# Altium PCB Logger_L072CB_LiPo_Flash_EEprom.PcbDoc
Units mil, origin at the board's own origin, x right, y up, seen from the top; angles counter-clockwise.
Board outline 2165.35 x 1181.1 mil, 2 copper layers (Top Layer, Bottom Layer); 53 components, 36 nets, 195 pads, 52 vias.
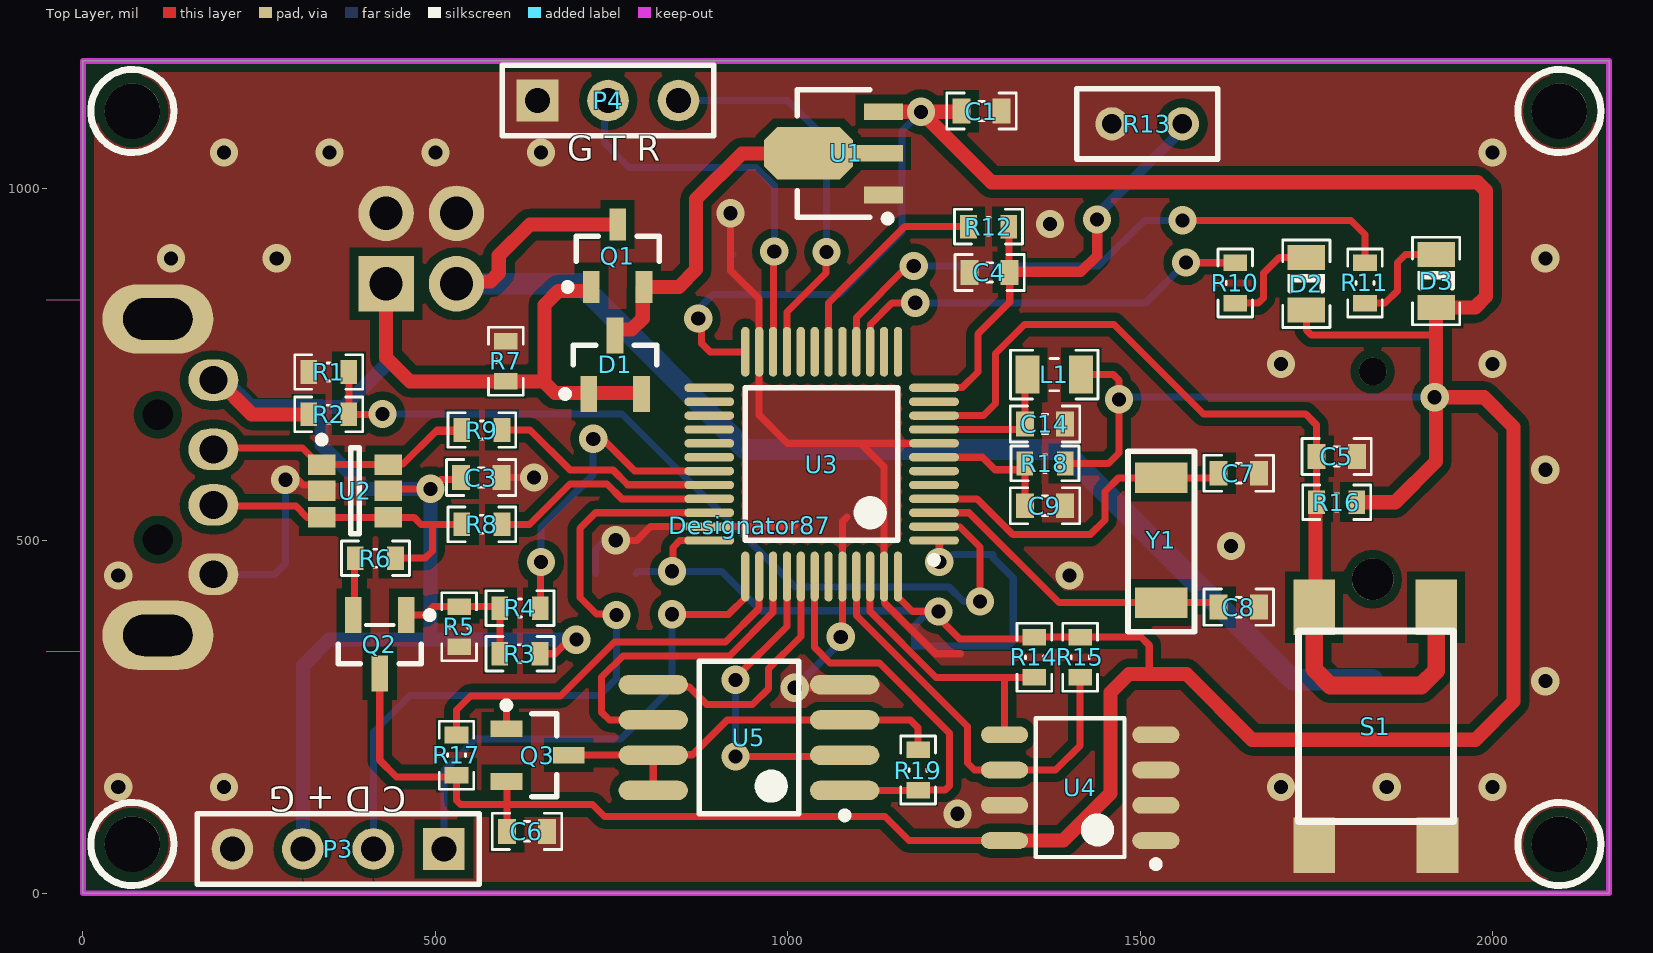
[diagram p0: Top Layer view]
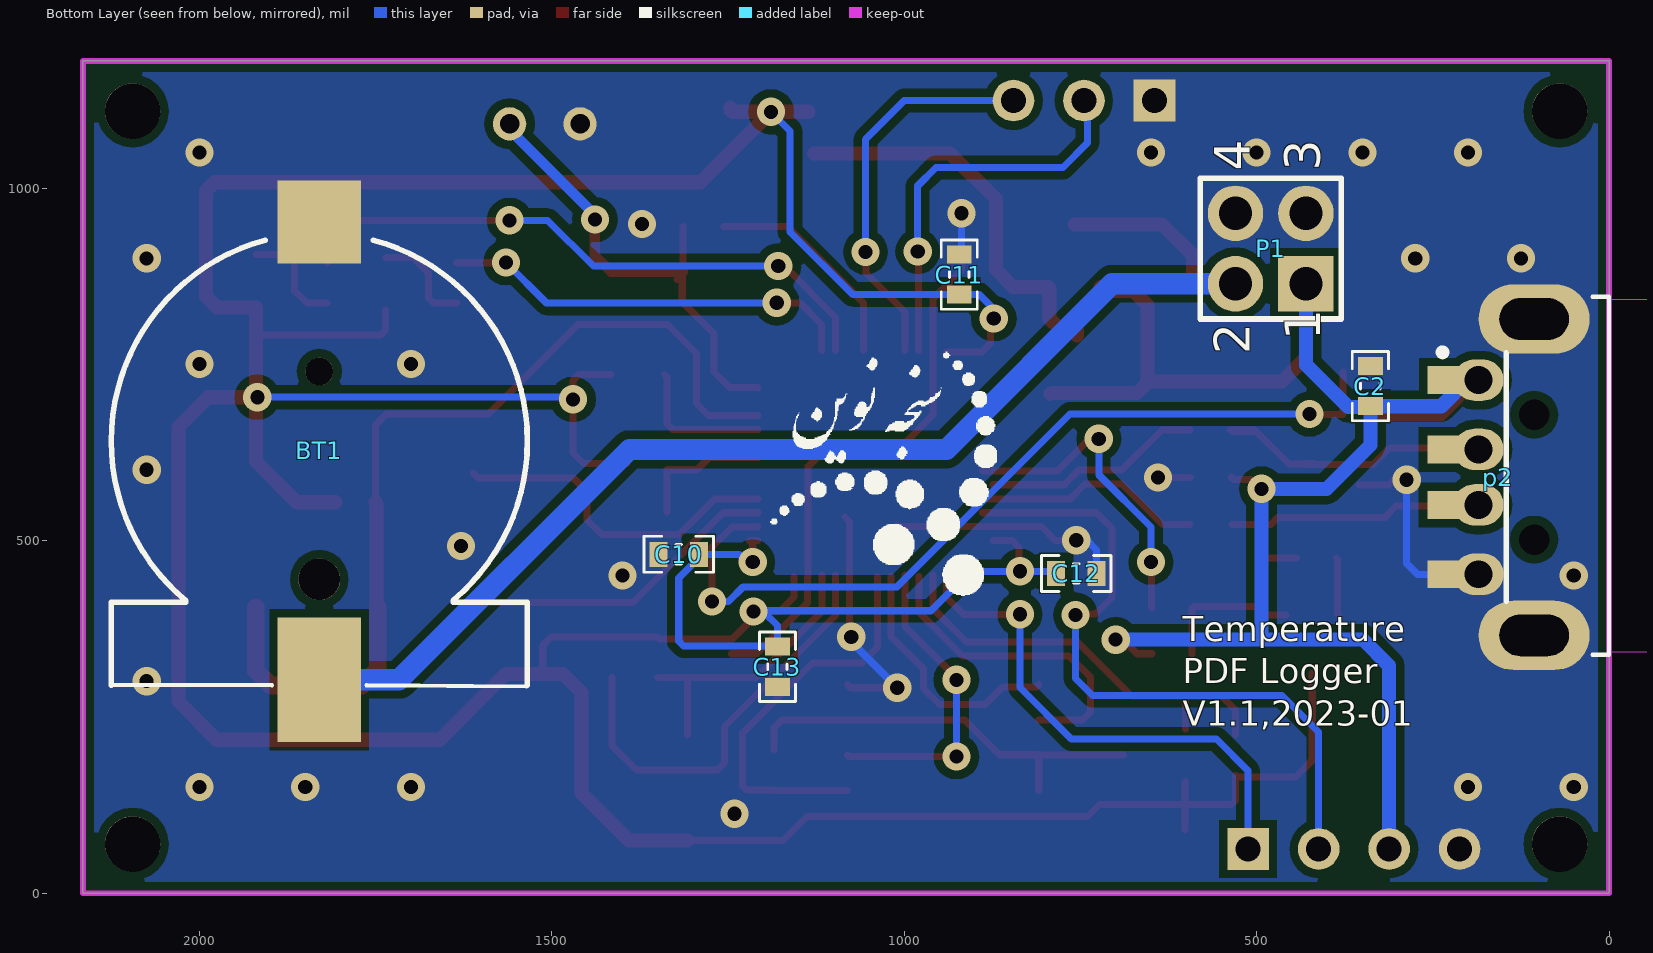
[diagram p1: Bottom Layer view, seen from below]
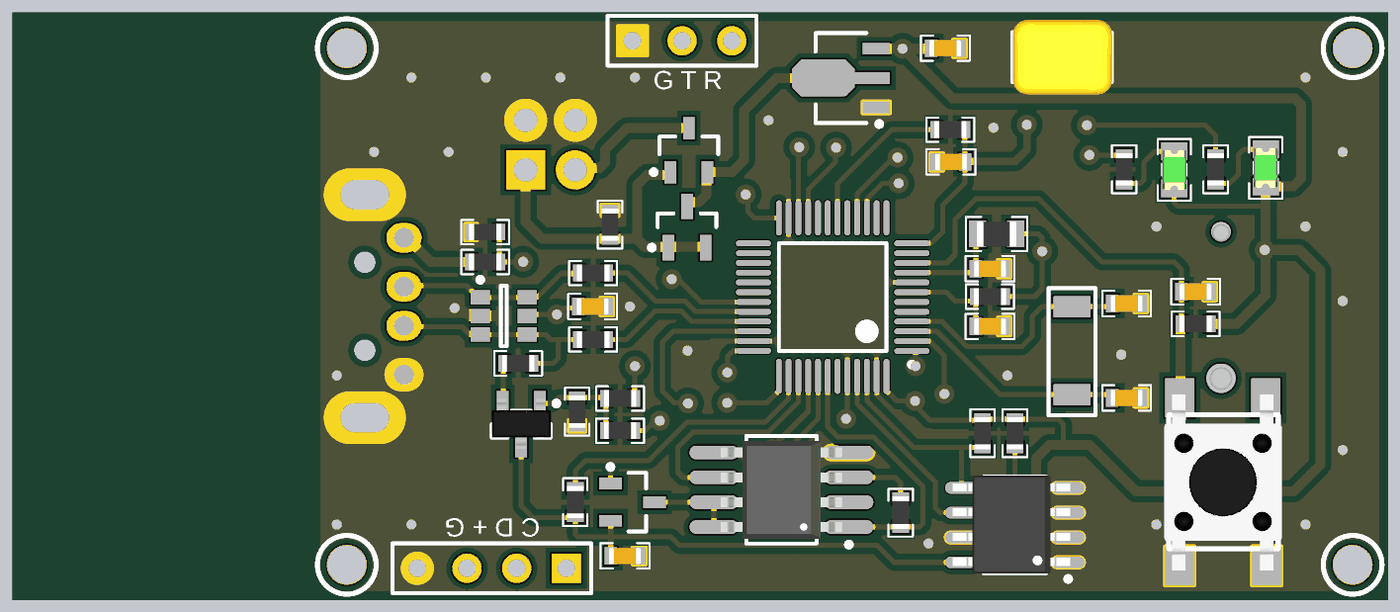
[diagram p2: 3D render of the assembled board from above, using the file's embedded part models]
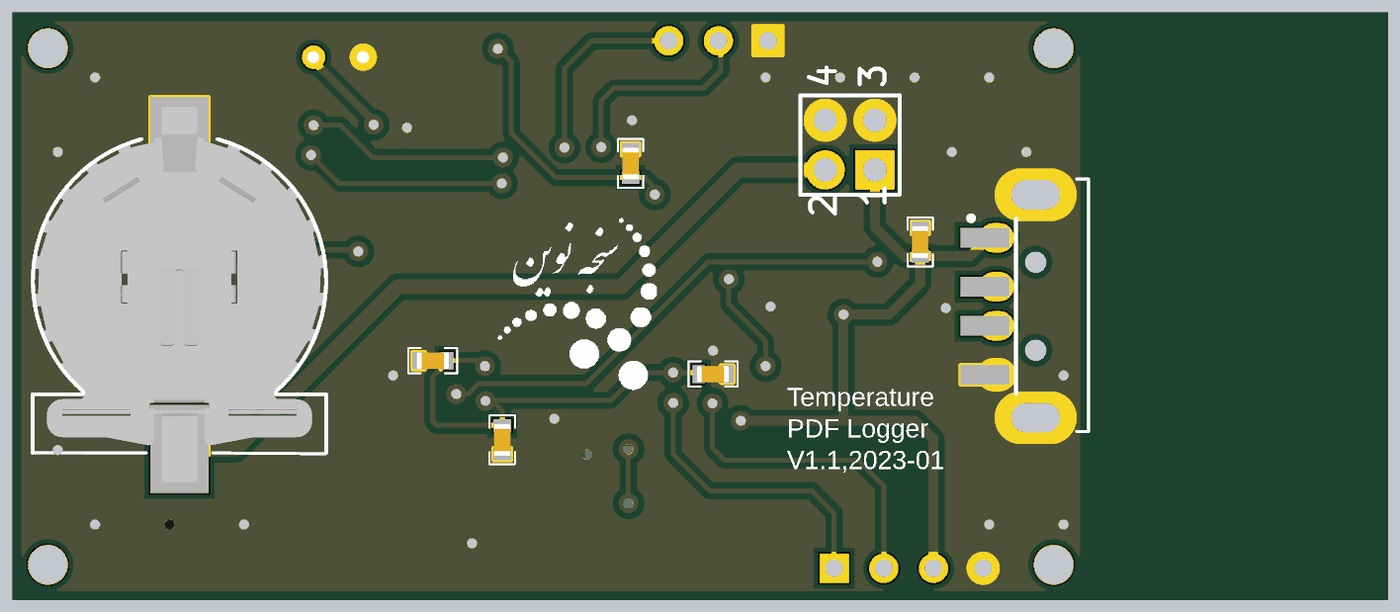
[diagram p3: 3D render of the assembled board from below, using the file's embedded part models]

## Layer stack, top to bottom
Top Solder: solder mask 0.4, Solder Resist, Dk 3.5
Top Layer: signal copper 1.4
Dielectric 1: dielectric 12.6, FR-4, Dk 4.8
Bottom Layer: signal copper 1.4
Bottom Solder: solder mask 0.4, Solder Resist, Dk 3.5

## Board outline
0,0 2165.35,0 2165.35,1181.1 0,1181.1

## Design rules (kind name [scope] priority, off if disabled: settings)
Clearance Clearance_1 [InNet('GND')] p1: gap=12 ignorepadtopadclearanceinfootprint=TRUE except(8: Arc-Arc Arc-Track Arc-SMDPad Track-Track Track-SMDPad)
Clearance [All] p2: gap=10 ignorepadtopadclearanceinfootprint=TRUE except(0: Arc-Hole Track-Hole SMDPad-Hole THPad-Hole Via-Hole Fill-Hole Poly-Hole Region-Hole Text-Hole; 8: Arc-Arc Arc-Track Arc-SMDPad Track-Track Track-SMDPad)
DiffPairsRouting [All] p1: maxlimit=10 minlimit=10 mostfreqgap=10 toplayer_minwidth=10 toplayer_maxwidth=15 toplayer_prefwidth=10 bottomlayer_minwidth=10 bottomlayer_maxwidth=15 bottomlayer_prefwidth=10 maxuncoupledlength=2000
PolygonConnect [All] p1: connectstyle=Direct reliefconductorwidth=10 reliefentries=4 polygonreliefangle="90 Angle" airgapwidth=10
RoutingVias [All] p1: holewidth=20 width=40 viastyle="Through Hole" minholewidth=20 minwidth=40 maxholewidth=20 maxwidth=40
SolderMaskExpansion [All] p1: expansion=4 istentingtop=FALSE
Width [All] p1: maxlimit=100 minlimit=8 preferedwidth=12 minimp=50.000000 maximp=50.000000 favimp=50.000000
29 further rules are at their usual default settings.

## Classes and differential pairs
differential pair USB_D: +USB_D_P -USB_D_N

## Components (designator, comment, footprint, x,y, rotation, side; value= is the part's Value field where it differs from the comment)
BT1 "BAT3V7" BTH2032-smd 1830,590.55 r90 bottom
C1 "100nF" CAP0603 1275,1110 r0 top
C2 "100nF" CAP0603 338.66,719.76 r90 bottom
C3 "100nF" CAP0603 565,590 r180 top
C4 "100nF" CAP0603 1286.46,881.1 r180 top
C5 "100nF" CAP0603 1778.9,620 r180 top
C6 "100nF" CAP0603 630,88 r0 top
C7 "4.3pF" CAP0603 1640,596.1 r0 top
C8 "4.3pF" CAP0603 1640,406.1 r0 top
C9 "100nF" CAP0603 1365,550 r0 top
C10 "100nF" CAP0603 1320,481.1 r0 bottom
C11 "100nF" CAP0603 922,878 r90 bottom
C12 "100nF" CAP0603 756,454 r180 bottom
C13 "100nF" CAP0603 1180,321.46 r270 bottom
C14 "100nF" CAP0603 1365,666.1 r0 top
D1 "BAT54C/MA720" SOT23_N 755,750 r90 top
D2 "LED0" LED_0805 1735.91,866.1 r90 top
D3 "LED0" LED_0805 1920,870 r90 top
Designator87 "Comment" LOGO_PARS_TOP 946,522 r180 top
L1 "Bead/100R" IND0805 1378.19,736.1 r180 top
P1 "Header 2X2" HDR2X2 430,865 r90 bottom
p2 "USB Connector" "USB A TYPE Right Angle" 0,590.55 r180 bottom
P3 "MHDR1X4" HDR1X4 512,63 r180 top
P4 "MHDR1X3" HDR1X3 645,1125 r0 top
Q1 "FDN360" SOT-23_N 758.66,904.76 r90 top
Q2 "BC817" SOT23_N 421.06,353.43 r270 top
Q3 "FDN360N" Micro3_N 645,196.1 r0 top
R1 "36K" RES0603 348.66,739.76 r0 top
R2 "18K" RES0603 348.66,679.76 r0 top
R3 "10K" RES0603 620,340 r180 top
R4 "100R" RES0603 620.12,404.76 r180 top
R5 "36K" RES0603 533.66,378.31 r90 top
R6 "1.5K" RES0603 415,475.55 r0 top
R7 "Res1" RES0603 600,755 r90 top value=47K
R8 "22R" RES0603 565.98,523.62 r180 top
R9 "22R" RES0603 565.98,657.48 r180 top
R10 "Res1" RES0603 1635,866.1 r90 top value=4.7K
R11 "Res1" RES0603 1819.09,866.1 r90 top value=4.7K
R12 "1%" RES0603 1285,946.1 r0 top value=10K
R13 "NTC 10K 1%" CAP_MLCC_RAD_0.1 1510,1092 r0 top
R14 "10K" RES0603 1350,335 r270 top
R15 "10K" RES0603 1415,335 r270 top
R16 "10K" RES0603 1778.9,555 r0 top
R17 "10K" RES0603 530,196.1 r90 top
R18 "10K" RES0603 1365,610 r0 top
R19 "10K" RES0603 1185,175 r270 top
S1 "SW-PB" SW-4PIN-SMD 1835,245 r270 top
U1 "HT7533_1-SOT89" SOT89N 1065,1050 r180 top
U2 "L13ESDL5V0C6-4" SOT23-6_M 386,571 r0 top
U3 "STM32L072CB" LQFP48_N 1048.11,609 r180 top
U4 "AT24C512C-SSHD-T" SO-8N 1415,150 r180 top
U5 "W25Q32FVSSIG" 8S2_M 945,221.1 r180 top
Y1 "32.768Khz" CM415 1530,501.1 r270 top

## Footprints (in the part's own frame and the unit in brackets; to place one, negate y for a bottom-side part, rotate by r counter-clockwise, add the part's x,y. Pads: shape width x height; smd on the part's side, far side on the other; paste and mask are expansions set on the pad)
8S2_M [mm] "SOP, 8-Leads, Body 5.3x5.3mm, Pitch 1.27mm, IPC Low Density"
  oval 2.5x0.7 smd: 1(-3.45,1.905) 2(-3.45,0.635) 3(-3.45,-0.635) 4(-3.45,-1.905) 5(3.45,-1.905) 6(3.45,-0.635) 7(3.45,0.635) 8(3.45,1.905)
  silkscreen extent -3.57,-2.75 1.8,2.93, body extent -3.1,-2.5 3.1,2.5, height 1.75
BTH2032-smd [mm] "COIN CELL BATTERY HOLDER 1220 12mm CR2032"
  round 1.5 hole 1.5 unplated: 0(-3.683,0)
  round 1 hole 1 unplated: 0(3.81,0)
  rect 4.5x3 smd: 1(-7.3,0)
  rect 3x3 smd: 2(9.2,0)
  silkscreen extent -7.54,-7.5 8.54,7.5, body extent -9,-7.37 10.2,7.37, height 4.35
CAP0603 [mm] "Chip Capacitor, 2-Leads, Body 1/60x0/80mm, IPC Medium Density DESIGNER:ABBAS BASEREH"
  rect 0.65x0.9 smd: 1(-0.725,0) 2(0.725,0)
  silkscreen extent -1.25,-0.65 1.25,0.65, body extent -0.82,-0.43 0.82,0.43, height 0.4
CAP_MLCC_RAD_0.1 [mm]
  round 1.2 hole 0.7: 1(-1.27,0) 2(1.27,0)
  silkscreen extent -2.54,-1.27 2.54,1.27, body extent -2.51,-1.91 2.57,1.91, height 7.36
CM415 [mm] "32.768Khz smd"
  rect 1.1x1.9 smd: 1(2.25,0) 2(-2.25,0)
  silkscreen extent -3.2,-1.2 3.3,1.2
HDR1X3 [mm] "Connector; Header; 3 Position"
  rect 1.5x1.5 hole 0.9: 1(0,0)
  round 1.5 hole 0.9: 2(2.54,0) 3(5.08,0)
  silkscreen extent -1.27,-1.27 6.35,1.27
HDR1X4 [mm] "Connector; Header; 4 Position"
  rect 1.5x1.5 hole 0.9: 1(0,0)
  round 1.5 hole 0.9: 2(2.54,0) 3(5.08,0) 4(7.62,0)
  silkscreen extent -1.27,-1.27 8.89,1.27
HDR2X2 [mm] "Connector; Header; 2x2 Position"
  rect 2x2 hole 1.2: 1(0,0)
  round 2 hole 1.2: 2(0,2.54) 3(2.54,0) 4(2.54,2.54)
  silkscreen extent -1.27,-1.27 3.81,3.81
IND0805 [mm] "Chip Inductor, 2-Leads, Body 2/00x1/25mm, IPC Medium Density DESIGNER:ABBAS BASEREH"
  rect 0.87x1.37 smd: 1(-0.97,0) 2(0.97,0)
  silkscreen extent -1.58,-0.87 1.58,0.87, body extent -1.02,-0.65 1.02,0.65, height 0.5
LED_0805 [mm]
  rect 0.9x1.35 smd: 1(-0.975,0) 2(0.925,0)
  silkscreen extent -1.6,-0.85 1.55,0.85, body extent -1.04,-0.62 0.98,0.63, height 1.1
LOGO_PARS_TOP [mil]
LQFP48_N [mm] "Thin QFP, 48-Leads, Body 7x7mm, Pitch 0.5mm, IPC Medium Density"
  oval 1.8x0.3 smd mask+0.07: 1(-4.05,2.75) 2(-4.05,2.25) 3(-4.05,1.75) 4(-4.05,1.25) 5(-4.05,0.75) 6(-4.05,0.25) 7(-4.05,-0.25) 8(-4.05,-0.75) 9(-4.05,-1.25) 10(-4.05,-1.75) 11(-4.05,-2.25) 12(-4.05,-2.75) 25(4.05,-2.75) 26(4.05,-2.25) 27(4.05,-1.75) 28(4.05,-1.25) 29(4.05,-0.75) 30(4.05,-0.25) 31(4.05,0.25) 32(4.05,0.75) 33(4.05,1.25) 34(4.05,1.75) 35(4.05,2.25) 36(4.05,2.75)
  oval 0.3x1.8 smd mask+0.07: 13(-2.75,-4.05) 14(-2.25,-4.05) 15(-1.75,-4.05) 16(-1.25,-4.05) 17(-0.75,-4.05) 18(-0.25,-4.05) 19(0.25,-4.05) 20(0.75,-4.05) 21(1.25,-4.05) 22(1.75,-4.05) 23(2.25,-4.05) 24(2.75,-4.05) 37(2.75,4.05) 38(2.25,4.05) 39(1.75,4.05) 40(1.25,4.05) 41(0.75,4.05) 42(0.25,4.05) 43(-0.25,4.05) 44(-0.75,4.05) 45(-1.25,4.05) 46(-1.75,4.05) 47(-2.25,4.05) 48(-2.75,4.05)
  silkscreen extent -4.18,-2.75 2.75,3.57, body extent -3.5,-3.5 3.5,3.5, height 1.6
Micro3_N [mm] "SOT23, 3-Leads, Body 2.9x1.3mm, Pitch 0.95mm, Lead Span 2.3mm, IPC Medium Density"
  rect 1.15x0.6 smd: 1(-1.125,0.95) 2(-1.125,-0.95) 3(1.125,0)
  silkscreen extent -1.25,-1.5 0.7,1.92, body extent -0.7,-1.5 0.7,1.5, height 1.12
RES0603 [mm] "Chip Resistor, 2-Leads, Body 1/60x0/80mm, IPC Medium Density DESIGNER:ABBAS BASEREH"
  rect 0.6x0.85 smd: 1(-0.725,0) 2(0.725,0)
  silkscreen extent -1.22,-0.63 1.22,0.63, body extent -0.82,-0.43 0.82,0.43, height 0.4
SO-8N [mm] "SOIC, 8-Leads, Body 4/89x3/90mm, Pitch 1/27mm, IPC Medium Density designer:abbas basereh"
  oval 1.7x0.6 smd mask+0.06: 1(-2.725,1.905) 2(-2.725,0.635) 3(-2.725,-0.635) 4(-2.725,-1.905) 5(2.725,-1.905) 6(2.725,-0.635) 7(2.725,0.635) 8(2.725,1.905)
  silkscreen extent -2.85,-2.5 1.6,2.88, body extent -2.82,-2.53 3.18,2.47, height 1.5
SOT23-6_M [mm] "SOT23, 6-Leads, Body 2.9x1.6mm, Pitch 0.95mm, Lead Span 2.7mm, IPC Low Density"
  rect 1x0.737 smd mask+0.07: 1(-1.2,0.95) 2(-1.2,0) 3(-1.2,-0.95) 4(1.2,-0.95) 5(1.2,0) 6(1.2,0.95)
  silkscreen extent -1.32,-1.55 0.15,1.97, body extent -0.9,-1.55 0.9,1.55, height 1.45
SOT23_N [mm] "SOT23, 3-Leads, Body 2.9x1.3mm, Pitch 0.95mm, Lead Span 2.3mm, IPC Medium Density"
  rect 1.3x0.6 smd: 1(-1.05,0.95) 2(-1.05,-0.95) 3(1.05,0)
  silkscreen extent -1.17,-1.5 0.7,1.92, body extent -0.7,-1.5 0.7,1.5, height 1.1
SOT89N [mm] "SOT89, 3-Leads, Body 4.5x2.4 mm, Pitch 1.5mm, Lead Span 4.1mm, IPC Medium Density"
  rect 1.4x0.6 smd: 1(-1.8,1.5) 3(-1.8,-1.5)
  rect 1.8x0.6 smd: 2(-1.6,0)
  oct 3.2x1.9 smd: 2(0.9,0)
  silkscreen extent -2.07,-2.3 1.3,2.47, body extent -1.3,-2.3 1.3,2.3, height 1.6
SOT-23_N [mm] "SOT23, 3-Leads, Body 2.9x1.3mm, Pitch 0.95mm, Lead Span 2.3mm, IPC Medium Density"
  rect 1.15x0.6 smd: 1(-1.125,0.95) 2(-1.125,-0.95) 3(1.125,0)
  silkscreen extent -1.25,-1.5 0.7,1.92, body extent -0.7,-1.5 0.7,1.5, height 1.11
SW-4PIN-SMD [mil]
  rect 78.74x59.06 smd: 1(177,87) 1(177,-88) 2(-161,85) 2(-161,-88)
  silkscreen extent -127,-110 143,110, body extent -168,-119 186,117, height 174
"USB A TYPE Right Angle" [mm] "Connector; USB1.1, Type A, SM; 4 Position; Right Angle DESIGNER ABBAS BASEREH"
  rect 2.5x1 smd: 1(-5.3,3.5) 2(-5.3,1) 3(-5.3,-1) 4(-5.3,-3.5)
  oval 1.8x1.5 hole 1: 1(-4.7,3.5) 2(-4.7,1) 3(-4.7,-1) 4(-4.7,-3.5)
  oval 4x2.5 hole 1.5 slot 2.5 at 0 deg: 5(-2.7,-5.7) 6(-2.7,5.7)
  round 0.8 hole 1.1 unplated: MH1(-2.7,-2.25) MH2(-2.7,2.25)
  Keep-Out Layer board cut-out: 0,6.4 0,-6.3 15.3,-6.3 15.3,6.4
  silkscreen extent -6.13,-6.4 0,6.5, body extent -4.9,-6.3 15.1,6.3, height 3.45

## Part data
BT1: library part "Battry Backup", "Battry Backup", Data=16-12-2016, Designer="Abbas Basereh"
C1 C2 C3 C4 C5 C6 C7 C8 C9 C10 C11 C12 C13 C14: library part Cap, "Capacitor", LatestRevisionDate=17-Jul-2002, LatestRevisionNote="Re-released for DXP Platform.", PackageDescription="Radial Cap, Thru-Hole; 2 Leads; 0.3 in Pin Spacing", PackageReference=RAD-0.3, Published=8-Jun-2000, Publisher="Altium Limited"
D1: library part BAT54C, "Schottky Barrier Double Diode", ComponentLink1Description="Manufacturer Link", ComponentLink1URL=http://www.semiconductors.philips.com/, ComponentLink2Description=Datasheet, ComponentLink2URL=http://www.semiconductors.philips.com/acrobat/datasheets/BAT54_SERIES_4.pdf, DatasheetVersion=4-Mar-2002, LatestRevisionDate=12-Dec-2006, LatestRevisionNote="IPC-7351 Footprint Added.", PackageDescription="3-Pin SOT-23 Package 0.95 mm Pitch, 2.3 mm Lead Span", PackageReference=SOT23, PackageVersion=May-1999, Published=17-Sep-2003, Publisher="Altium Limited"
D2 D3: "Typical INFRARED GaAs LED", LatestRevisionDate=08-Jul-2005, LatestRevisionNote="Mech Layer 1 removed.", PackageDescription="LED; 2 Leads", PackageReference=LED-0, Published=8-Jun-2000, Publisher="Altium Limited"
L1: library part Inductor, "Inductor", Code_IEC=1005, Code_JEITA=0402, LatestRevisionDate=29-May-2009, LatestRevisionNote="IPC-7351 Footprint Added.", PackageDescription="Chip Inductor", PackageReference=0402-A, Published=8-Jun-2000, Publisher="Altium Limited"
P1: "Header, 2-Pin, Dual row", LatestRevisionDate=17-Jul-2002, LatestRevisionNote="Re-released for DXP Platform.", Publisher="Altium Limited"
p2: library part "USB A CONNECTOR", "USB Connector-A Type", Max Current=600mA, Category=Connector, ComponentLink1Description=Datasheet, ComponentLink2Description=Reference, Designer="ABBAS BASEREH", Mounting Technology="Surface Mount\Through-Hole", Pin Count=4-6, Publisher="ABBAS BASEREH", Status=Unreleased, Update=1395-11-17
P3: "Header, 4-Pin", LatestRevisionDate=17-Jul-2002, LatestRevisionNote="Re-released for DXP Platform.", Publisher="Altium Limited"
P4: "Header, 3-Pin", LatestRevisionDate=17-Jul-2002, LatestRevisionNote="Re-released for DXP Platform.", Publisher="Altium Limited"
Q1: library part IRLML5103, "HEXFET Power MOSFET", ComponentLink1Description="Manufacturer Link", ComponentLink1URL=http://www.irf.com/, ComponentLink2Description=Datasheet, ComponentLink2URL=http://www.irf.com/product-info/datasheets/data/irlml5103.pdf, DatasheetVersion=Aug-1997, LatestRevisionDate=20-Nov-2009, LatestRevisionNote="IPC-7351 Footprint Added.", PackageDescription="3-Pin SOT-23 Package 0.95 mm Pitch, 2.3 mm Lead Span", PackageReference=SOT-23, Published=8-Jun-2000, Publisher="Altium Limited"
Q2: "45 V, 500 mA NPN general-purpose transistors", ComponentLink1Description="Manufacturer Link", ComponentLink1URL=http://www.nxp.com/, ComponentLink2Description=Datasheet, ComponentLink2URL=http://www.nxp.com/, DatasheetVersion=2017, LatestRevisionDate=2017, LatestRevisionNote="IPC-7351 Footprint Added.", PackageDescription="3-Pin SOT-23 Package 0.95 mm Pitch, 2.3 mm Lead Span", PackageReference=SOT23, PackageVersion=2017-2-8, Published=2017-2-8, Publisher="Abbas Basereh"
Q3: library part IRLML6401, "HEXFET Power MOSFET", ComponentLink1Description="Manufacturer Link", ComponentLink1URL=http://www.irf.com/, ComponentLink2Description=Datasheet, ComponentLink2URL=http://www.irf.com/product-info/datasheets/data/IRLML6401.pdf, DatasheetVersion=2-Jul-2001, PackageDescription="3-Pin SOT-23 Package 0.95 mm Pitch, 2.3 mm Lead Span", PackageReference=Micro3, PackageVersion=Jul-2001, Published=17-Sep-2003, Publisher="Altium Limited"
R1 R2 R3 R4 R5 R6 R8 R9 R12 R14 R15 R16 R17 R18 R19: library part Res1, "Resistor", LatestRevisionDate=17-Jul-2002, LatestRevisionNote="Re-released for DXP Platform.", PackageDescription="Axial Device, Thru-Hole; 2 Leads; 0.3 in Pin Spacing", PackageReference=AXIAL-0.3, Published=8-Jun-2000, Publisher="Altium Limited"
R7 R10 R11: "Resistor", LatestRevisionDate=17-Jul-2002, LatestRevisionNote="Re-released for DXP Platform.", PackageDescription="Axial Device, Thru-Hole; 2 Leads; 0.3 in Pin Spacing", PackageReference=AXIAL-0.3, Published=8-Jun-2000, Publisher="Altium Limited"
R13: library part "Res Varistor", "Varistor (Voltage-Sensitive Resistor)", Code_IPC=RESC2012, LatestRevisionDate=29-May-2009, LatestRevisionNote="IPC-7351 Footprint Added.", PackageDescription="Chip Resistor 0805 Case Size", PackageReference=6-0805, PackageVersion=Mar-2003, Published=24-Mar-1999, Publisher="Altium Limited"
S1: "Switch", LatestRevisionDate=17-Jul-2002, LatestRevisionNote="Re-released for DXP Platform.", PackageDescription="Switch; 2 Leads", PackageReference=SPST-2, Published=24-Mar-1999, Publisher="Altium Limited"
U1: "100mA Low Power LDO, Output Voltage 3.3V, SOT89 Pkg", Code_IPC=SOT89, ComponentLink1Description="Manufacturer URL", ComponentLink1URL=http://www.holtek.com/, ComponentLink2Description=Datasheet, ComponentLink2URL=http://www.holtek.com/pdf/consumer/75xx_1v180.pdf, ComponentLink3Description="Package Specification", ComponentLink3URL=http://www.holtek.com/english/literature/package.pdf, DatasheetVersion="Rev1.80, Mar-2010", PackageDescription="3-Pin SOT-89 Package 1.5 mm Pitch, 4.1 mm Lead Span", PackageReference=SOT89, PackageVersion=25/05/2010
U2: library part USBUFxxW6, "ESD PROTECTION DEVICE"
U3: library part STM32F103C8T6, "STM32 ARM-based 32-bit MCU with 64 Kbytes Flash, 48-pin LQFP, Industrial Temperature", ComponentLink1Description="Manufacturer Link", ComponentLink1URL=www.st.com/stm32, ComponentLink2Description=Datasheet, ComponentLink2URL=http://www.st.com/stonline/products/literature/ds/13587.pdf, DatasheetVersion="rev6, Mar-2008", PackageDescription="48-Pin Low-Profile Quad Flat Pack, 7 x 7 mm Body, 0.5 mm Pitch (LQFP48)", PackageReference=LQFP48, PackageVersion=Mar-2008, Published=30-May-2008, Publisher="Altium Limited"
U4: library part AT24C08BN-SP25-B, "I2C-Compatible (2-wire) Serial EEPROM / 512-Kbit (65,536 x 8)", Code_IPC=SOIC127P600-8, Code_JEDEC=MS-012-AA, ComponentLink1Description="Manufacturer Link", ComponentLink1URL=http://www.atmel.com/products/serial/default.asp, ComponentLink2Description=Datasheet, ComponentLink2URL=http://www.atmel.com/dyn/resources/prod_documents/doc8517.pdf, ComponentLink3Description="Atmel.com Home", ComponentLink3URL=http://www.atmel.com, DatasheetVersion="8517C,  Jan-2009", PackageDescription="8-Lead (0.150\" Wide Body), Plastic Gull Wing Small Outline (JEDEC SOIC)", PackageReference=8S1, PackageVersion="revC, Mar-2005", Published=20-Sep-2010, Publisher="Altium Limited"
U5: library part W25Q, "SERIAL FLASH MEMORY WITH DUAL, QUAD SPI"
Y1: library part XTAL_Crystal, "XTAL Crystal", ComponentLink1Description=Datasheet, ComponentLink2Description=Reference, Design Date=2017-1-3, Designer="ABBAS BASEREH", Mounting Technology="Surface Mount\Through-Hole", Status=Unreleased

## Free pads (board coordinates)
  round 78.74 hole 78.74: 2(70,70) 2(70,1110) 2(2095,70) 2(2095,1110)

## Via types
v1: diameter 40, hole 20, Top Layer to Bottom Layer, tented both sides, 52 vias

## Nets (pads, with @x,y where several pads share a name; then routed paths per layer and width w, separated by ;. In a path a pad name is that pad's centre, name@x,y a point inside that pad or via, vN(x,y) a via of type N, cw(c..) or ccw(c..) an arc to the next point about the centre after c; other vN are vias at no path point)
+5VUSB: C2.1 C3.2 D1.1 D1.2 P1.1 p2.1 P3.3 Q1.1 R2.1 R3.1 R7.1 U2.5 | length 2518.4
  Top Layer w10: U2.5 436.24,574 v1(493,574) 495,574 508,587 532.35,587 535.91,590.55 C3.2 ; R3.1 670,340 690,360 v1(700,360)
  Top Layer w20: p2.1@185.04,728.35 190.94,728.35 239.53,679.76 R2.1 ; P1.1 430,760.38 463.92,726.46 R7.1 653.54,726.46 655,725 ; Q1.1 719.45,858.66 719.45,855 675,855 655,835 655,725 ; D1.2 790.83,710.24 740,710.24 739.76,710 670,710 655,725
  Bottom Layer w20: p2.1@185.04,728.35 200.88,728.35 238,691.22 C2.1 ; P3.3 312,323 349,360 490,360 ; P1.1 430,750 370,690 339.88,690 C2.1 ; v1(700,360) 490,360 ; C2.1 338.66,636.34 401,574 v1(493,574) 493,363 490,360
E\N\A\B\L\E\_\F\L\A\S\H\: Q3.1 R17.2 U3.38 | length 618.4
  Top Layer w10: R17.2 530,260 550,280 600,280 ; Q3.1 600.71,279.29 600,280 ; U3.38@959.53,451.42 U3.38 959.53,404.6 911.68,356.75 754.25,356.75 677.5,280 600,280
GND: BT1.2 C1.2 C2.2 C3.1 C4.2 C5.1 C6.2 C7.2 C8.2 C9.2 C10.2 C11.2 C12.2 C13.2 C14.2 P1.3 P1.4 p2.4 p2.5 p2.6 P3.4 P4.1 R1.1 R5.1 R7.2 R13.1 S1.1 U1.1 U2.2 U3.8 U3.23 U3.35 U3.44 U3.47 U4.1 U4.2 U4.3 U4.4 U4.7 U5.4 | length 2032.4
  Top Layer w10: v1(287.07,586.92) 289.04,586.92 297.12,595 312.46,579.65 U2.2@355,579.65 ; C3.1 v1(640,590) ; v1(756,501) 786,501 805.42,520.42 U3.35 1008.42,520.42 1010,522 ; v1(919,965) 919,884 959.53,843.47 U3.23 959.53,678.53 999.53,638.53 1103.54,638.53 ; v1(1010,291.75) 1076.47,291.75 U5.4 ; v1(1075.27,364) 1077.64,366.37 U3.44 1077.64,527.64 1084,534 ; U3.8 1103.54,638.53 ; 1245,340 1210,340 1205,345 1204.67,345 1137.04,412.63 1137.04,449.2 U3.47 1136.69,605.38 1103.54,638.53
  Bottom Layer w10: p2.4@185.04,452.76 208.66,452.76 271.55,452.76 287.07,468.27 v1(287.07,586.92) ; C12.2 727.46,487.46 741,501 v1(756,501) ; v1(919,965) 919,909.54 C11.2 ; v1(1010,291.75) 1075.27,357.02 v1(1075.27,364)
  other v1: 1241,113 50,151.1 200,151.1 1700,151.1 1850,151.1 2000,151.1 2075,301.1 50,451.1 1400,451.1 1629,493 2075,601.1 1700,751.1 2000,751.1 125,901.1 275,901.1 2075,901.1 1372,950 200,1051.1 350,1051.1 500,1051.1 650,1051.1 2000,1051.1
I2C_SCL: R15.2 U3.45 U4.6 | length 606.8
  Top Layer w10: U3.45@1097.32,451.42 1097.32,394.27 1255,236.59 1255,185 1265,175 U4.6 1380,175 1415,210 R15.2
I2C_SDA: R14.2 U3.46 U4.5 | length 404.6
  Top Layer w10: U3.46@1117.01,451.42 1117.01,400.04 1210.59,306.46 1307.72,306.46 ; U4.5 1307.72,306.46 ; R14.2 1307.72,306.46
LED1_TIM2_CH1: R10.2 U3.15 | length 591.2
  Top Layer w10: U3.15@1117.01,770.31 1117.35,770.66 1117.35,807.24 1148.11,838 v1(1181,838) ; v1(1565,895) 1565.18,894.82 1634.82,894.82 R10.2
  Bottom Layer w10: v1(1181,838) 1508,838 v1(1565,895)
LED2_TIM3_CH1: R11.2 U3.16 | length 874.4
  Top Layer w10: U3.16@1097.32,770.31 1097.32,817.32 1170,890 v1(1178.75,890) ; v1(1560,955) 1799.09,955 1819.09,935 R11.2
  Bottom Layer w10: v1(1178.75,890) 1441,890 1506,955 v1(1560,955)
LPUART1_RX: P4.3 U3.21 | length 559.2
  Top Layer w10: U3.21@998.9,770.31 998.9,825 1054.14,880.24 1054.14,909.14 v1(1055,910)
  Bottom Layer w10: P4.3@840,1125 P4.3@842.5,1122.5 ; P4.3 1000,1125 1055,1070 v1(1055,910)
LPUART1_TX: P4.2 U3.22 | length 560.6
  Top Layer w10: U3.22@979.21,770.31 979.56,770.66 979.56,909.56 v1(980.92,910.92)
  Bottom Layer w10: P4.2@740,1125 740,1065 775,1030 955,1030 980.92,1004.08 v1(980.92,910.92)
NetBT1_1: BT1.1 P1.2 Q1.3 | length 1810.8
  Top Layer w20: P1.2 533.28,868.28 578.28,868.28 590,880 590,905 634.06,949.06 Q1.3
  Bottom Layer w30: P1.2 705,865 940,630 1390,630 1716.85,303.15 BT1.1
NetC7_1: C7.1 U3.4 Y1.2 | length 484.2
  Top Layer w10: U3.4 1268.87,559.79 1319.33,509.33 1429.33,509.33 1450,530 1450,570 1469.69,589.69 Y1.2 1605.04,589.69 C7.1
NetC8_1: C8.1 U3.3 Y1.1 | length 459.4
  Top Layer w10: U3.3 1257.42,540.1 1385,412.52 Y1.1 1605.04,412.52 C8.1
NetC14_1: C14.1 L1.2 U3.9 | length 203.7
  Top Layer w10: U3.9 1328.66,658.21 1330.43,659.98 1330.43,660.08 C14.1 1336.46,732.56 L1.2
NetD1_3: D1.3 Q1.2 U1.2 | length 567.7
  Top Layer w20: D1.3 755,798.19 756.81,800 778.28,800 794.25,815.97 794.25,858.66 Q1.2 845.47,860.47 870,885 870,985 935,1050 1029.57,1050 U1.2@1127.99,1050
NetD2_2: D2.2 R10.1 | length 148.3
  Top Layer w10: R10.1 1667.56,837.56 1675,845 1675,880 1697.5,902.5 D2.2
NetD3_2: D3.2 R11.1 | length 152.9
  Top Layer w10: R11.1 1847.56,837.56 1865,855 1865,895 1876.4,906.4 D3.2
Netp2_2: p2.2 R9.2 U2.1 U2.6 | length 434.2
  Top Layer w10: p2.2@185.04,629.92 187.12,632 311.22,632 334.82,608.4 U2.1 U2.6 433.84,609 454,609 500.55,655.55 ; U2.6@418.39,610.24 U2.6@432.56,610.24 ; R9.2 R9.2@536.46,657.48 ; 500.55,655.55 534.53,655.55 R9.2@536.46,657.48 ; 500.55,655.55 502.48,657.48 R9.2@536.46,657.48
Netp2_3: p2.3 R6.2 R8.2 U2.3 U2.4 | length 456.3
  Top Layer w10: p2.3@185.04,551.18 186.77,549.45 302.07,549.45 318.08,533.44 328.34,533.44 328.5,533.6 U2.3 U2.4 469.83,533.6 479.8,523.62 495,523.62 ; R6.2 485.55,475.55 495.86,485.86 495.86,522.76 495,523.62 ; R8.2@535.12,523.62 495,523.62
NetQ2_1: Q2.1 R3.2 R4.2 R5.2 | length 203.8
  Top Layer w10: Q2.1 484.76,394.76 496.85,406.85 R5.2 589.49,406.85 R4.2 591.52,404.7 591.52,340.06 R3.2
NetQ2_2: Q2.2 R6.1 | length 81.9
  Top Layer w10: Q2.2 385.06,396.16 385.06,474.15 R6.1
NetQ3_3: Q3.3 R19.1 U5.3 U5.7 U5.8 | length 602.5
  Top Layer w10: Q3.3 U5.7 ; U5.8 U5.7 ; R19.1 1185,235 1173.9,246.1 U5.3 914.1,246.1 864.7,196.7 809.78,196.7 U5.7
NRST: C9.1 R18.1 U3.7 | length 196.2
  Top Layer w10: U3.7 1276.16,618.84 1293.9,601.1 1336.46,601.1 C9.1@1336.46,541.1
NTC_SAMPLE: C4.1 R12.2 R13.2 U3.12 | length 676.4
  Top Layer w10: U3.12 1207.91,717.61 1247.61,717.61 1270,740 1270,794 1315,839 1315,878.9 C4.1@1322.8,871.1 ; R12.2 1314.27,945.37 C4.1@1314.27,881.83
  Top Layer w15: C4.1@1314.27,881.83 1415.83,881.83 1439,905 v1(1439,956)
  Bottom Layer w15: v1(1439,956) 1439,962.76 1560,1083.77 R13.2
SPI_CLK: U3.39 U5.6 | length 459.7
  Top Layer w10: U5.6 746.9,246.1 736,257 736,307 766,337 917.38,337 979.21,398.83 U3.39
SPI_CS: R19.2 U3.42 U5.1 | length 568.8
  Top Layer w10: U3.42 1038.27,348.67 1059.94,327 1130,327 1229.73,227.27 1229.73,152.73 1223.46,146.46 R19.2 1184.82,146.28 1081,146.28 U5.1
SPI_MISO: U3.40 U5.2 | length 443.3
  Top Layer w10: v1(926,194) 1078.72,194 U5.2 ; v1(926,303) 926,306 998.9,378.9 U3.40 U3.40@998.9,451.42
  Bottom Layer w10: v1(926,194) v1(926,303)
SPI_MOSI: U3.41 U5.5 | length 362.5
  Top Layer w10: U5.5 812.53,292.74 860.26,292.74 885,268 950.14,268 973,290.86 973,319 1018.58,364.58 U3.41
START_STOP: C5.2 R16.1 S1.2 U3.10 | length 1326.4
  Top Layer w10: U3.10 1277.9,677.9 1295,695 1295,766.24 1335.76,807 1463,807 1590,680 1735,680 1750,665 1750,620 R16.1@1750,554.65
  Top Layer w20: S1.2@1747,406 1748.68,407.68 1748.68,553.32 1750,554.65 R16.1
  Top Layer w25: S1.2@1747,406 1747,318 1770,295 1899,295 1920,316 S1.2@1920,406
SWCLK: P3.1 U3.37 | length 733.1
  Top Layer w10: v1(836,396) 915.82,396 939.84,420.02 U3.37 U3.37@939.84,451.42
  Bottom Layer w10: P3.1 512,174 557,219 763,219 836,292 v1(836,396)
SWDIO: P3.2 U3.34 | length 985.7
  Top Layer w10: v1(757,395) 755.75,396.25 728.75,396.25 705,420 705,518 727.1,540.1 U3.34
  Bottom Layer w10: P3.2 412,229 464,281 733,281 757,305 v1(757,395)
USB_D_N: R9.1 U3.32 | length 311.7
  Top Layer w10: R9.1 634.52,657.48 691,601 751.78,601 772.78,580 ; 772.78,579.79 809.79,579.79 ; 810,579.79 U3.32@874.31,579.79
USB_D_P: R8.1 U3.33 | length 326.4
  Top Layer w10: R8.1 633.62,523.62 691,581 743.49,581 764.49,560 ; 764.49,559.79 799.79,559.79 ; 800,559.79 U3.33
USB_DET: R1.2 R2.2 U3.2 | length 1221
  Top Layer w10: R1.2 R2.2 424.76,679.76 v1(425,680) ; U3.2 1207.91,520.07 1244.48,520.07 1273,491.56 v1(1273,414)
  Bottom Layer w10: v1(425,680) 765.05,680 1010.05,435 1228.5,435 1249.5,414 v1(1273,414)
USB_RENUM: R4.1 U3.31 | length 455.1
  Top Layer w10: R4.1 649.33,405.43 649.33,469.33 v1(650,470) ; v1(724,645) 737,645 782.84,599.16 U3.31
  Bottom Layer w10: v1(650,470) 650,520 724,594 v1(724,645)
VCC: C1.1 C6.1 C10.1 C11.1 C12.1 C13.1 D2.1 D3.1 L1.1 Q2.3 Q3.2 R14.1 R15.1 R16.2 R17.1 R18.2 U1.3 U3.1 U3.24 U3.36 U3.48 U4.8 | length 7163.2
  Top Layer w10: Q2.3 421.06,188.94 445,165 527.44,165 R17.1 530,131.86 535.86,126 601.46,126 ; Q3.2 601.46,157.95 601.46,126 ; C6.1@601.46,90 601.46,126 ; v1(836,457) 837,458 837,491 846.39,500.39 873.55,500.39 U3.36@873.9,500.73 ; v1(873,815.5) 877.5,811 877.5,780.5 889.55,768.45 U3.24 ; U3.48 1156.38,420.51 1176.89,400 1205,400 v1(1214,400) ; v1@1203,402 1244,361 1347.46,361 R14.1 R15.1 1501.46,363.54 1513,352 1513,311 ; U3.1 1218.93,500.73 1219.77,499.9 1215,495.13 v1(1215,470) ; U4.8 1172,75 1138,109 740,109 723,126 601.46,126 ; R18.2 1455,610 1470,625 v1(1470,701) 1470,728 1461.9,736.1 L1.1 ; D2.1 1735.91,799.09 1743,792 1912,792 1920,800
  Top Layer w20: U1.3 1189,1109.06 v1(1189,1109) 1289,1009 1979,1009 1991,997 1991,847 1975.6,831.6 D3.1 1920,800 1920,792 v1@1920,706.5 ; v1@1205,1109.06 1243.66,1109.06 1246.46,1111.85 C1.1@1246.46,1115 ; U4.8 1391,75 1458,142 1458,285 1484,311 1513,311 1566,311 1659,218 1976,218 2030,272 2030,662 1988,704 v1@1922.5,704 ; R16.2 1862,555 1920,613 1920,704 v1(1918,704)
  Bottom Layer w10: C12.1 787.54,457 v1(836,457) 906,457 962,401 1213,401 v1(1214,400) ; v1(873,815.5) 873,829 893.46,849.46 C11.1 1073,849.46 1162,938.46 1162,1082 v1(1189,1109) ; v1@1198,398 1180,380 C13.1 1181,351 1313,351 1320,358 1320,447.64 1291.46,476.18 C10.1 1234.42,481.1 1219.97,466.66 1216.63,470 v1(1215,470) ; v1(1470,701) 1473,704 v1(1918,704)
VOUT_VCC: R12.1 U3.18 | length 310.9
  Top Layer w10: U3.18@1057.95,770.31 1057.95,837.95 1084.47,864.47 1166.1,946.1 R12.1
pads on no net: BT1.0 p2.MH1 p2.MH2 U3.5 U3.6 U3.11 U3.13 U3.14 U3.17 U3.19 U3.20 U3.25 U3.26 U3.27 U3.28 U3.29 U3.30 U3.43

## Polygon pours and split planes (outlines as drawn)
GND on Bottom Layer "GND_L02_P001" (solid, remove dead copper, pour order 1): 2165.35,0 2165.35,1181.1 0,1181.1 0,0
GND on Top Layer "GND_L01_P000" (solid, remove dead copper, pour order 0): 2165.35,0 2165.35,1181.1 0,1181.1 0,0

## Keep-outs
Keep-Out Layer:
  the board outline again, w8

## Silkscreen, mask and mechanical layers (free items; w line width, h text height)
Top Overlay:
  circle w10: c70,70 r59.06
  circle w10: c2095,70 r59.06
  circle w10: c70,1110 r59.06
  circle w10: c2095,1110 r59.06
  text "G T R" at 687,1027.64 h60
  text "C D + G" at 459,163.36 h60 r180
Bottom Overlay:
  text "Temperature / PDF Logger  / V1.1,2023-01" at 605,226 h60

## Dimensions
2165.35,0 to 0,0 on Mechanical 15
2165.35,1181.1 to 2165.35,0 on Mechanical 15

## Text inside footprints (layer, text, board x,y; h text height)
P1: Bottom Overlay "3" at 410,1025 h50 r270; Bottom Overlay "4" at 510,1025 h50 r270; Bottom Overlay "2" at 510,765 h50 r270; Bottom Overlay "1" at 410,785 h50 r270
p2: Mechanical 1 "PCB Edge" at -18.6,386.91 h9.84 r270